# Altium PCB wol_pcb.PcbDoc
Units mm, origin at the board's own origin, x right, y up, seen from the top; angles counter-clockwise.
Board outline 20 x 58 mm, 2 copper layers (Top Layer, Bottom Layer); 33 components, 28 nets, 152 pads, 24 vias.
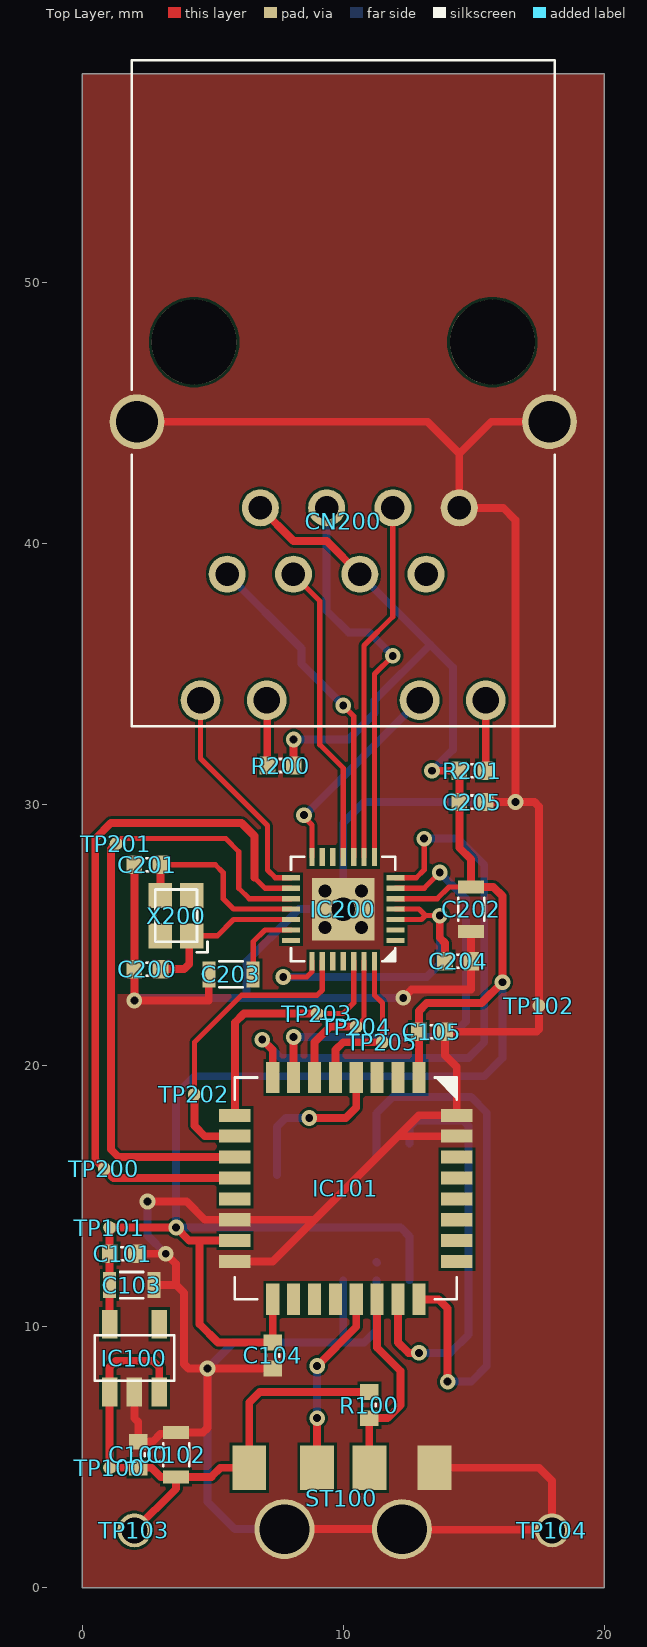
[diagram p0: Top Layer view]
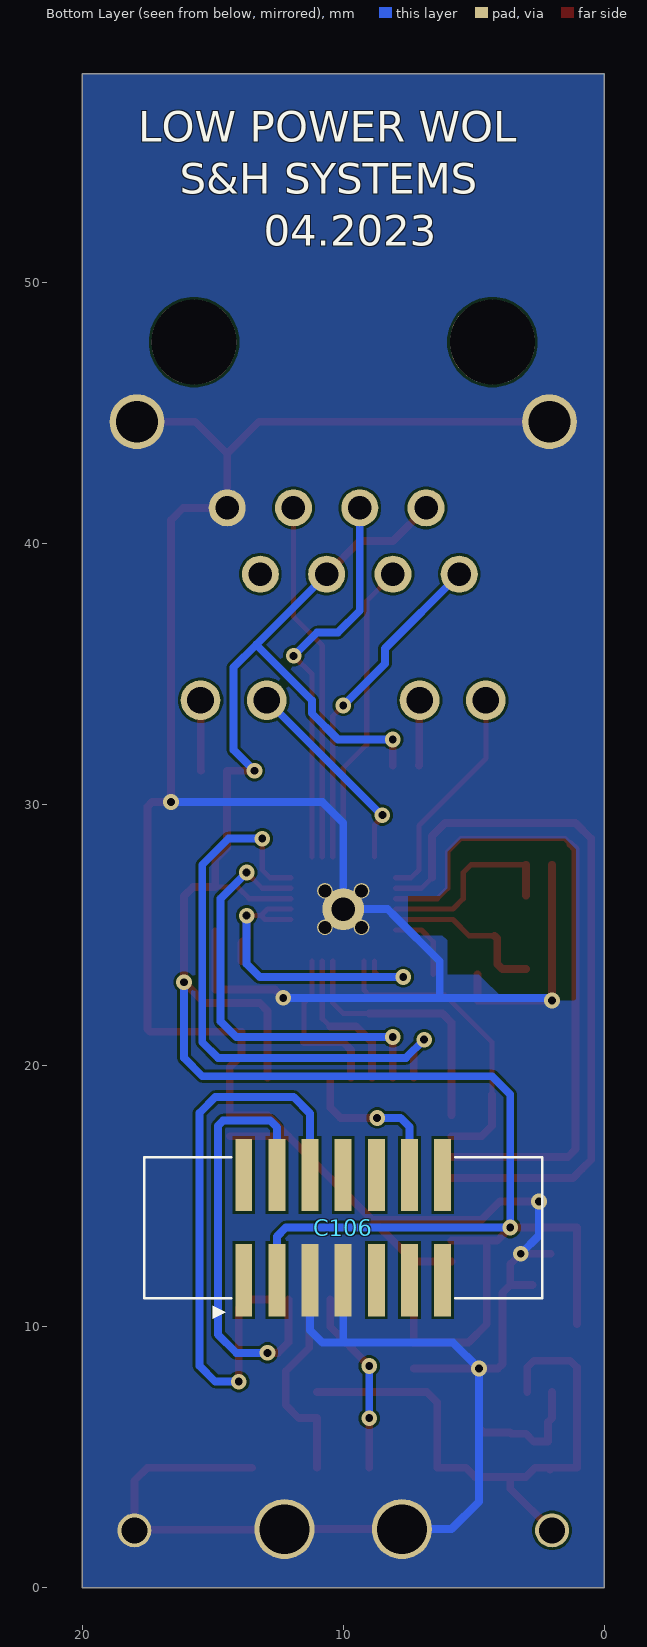
[diagram p1: Bottom Layer view, seen from below]
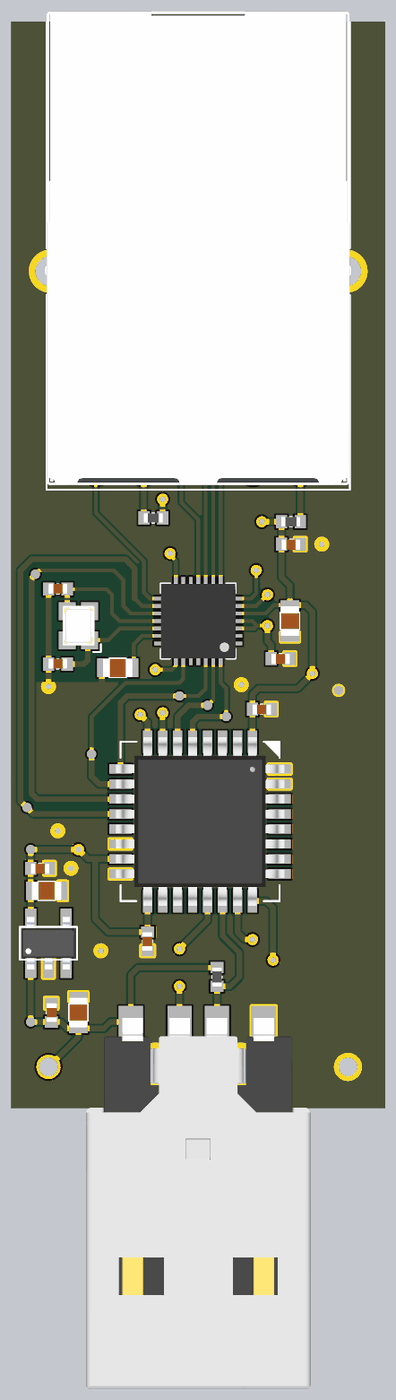
[diagram p2: 3D render of the assembled board from above, using the file's embedded part models]

## Layer stack, top to bottom
Top Solder: solder mask 0.0102, Solder Resist, Dk 3.5
Top Layer: signal copper 0.0356
Dielectric 1: dielectric 0.32, FR-4, Dk 4.8
Bottom Layer: signal copper 0.0356
Bottom Solder: solder mask 0.0102, Solder Resist, Dk 3.5

## Board outline
0,0 20,0 20,58 0,58

## Design rules (kind name [scope] priority, off if disabled: settings)
Clearance [All] p1: gap=0.1 ignorepadtopadclearanceinfootprint=FALSE
HoleSize [All] p1: absolutevalues=TRUE maxlimit=20 minlimit=0.025 maxpercent=80.000 minpercent=20.000
MinimumSolderMaskSliver [HasFootprint('No Footprint')] p1: minsoldermaskwidth=0.1
PlaneConnect [All] p1: planeconnectstyle=Direct reliefexpansion=0.508 reliefentries=4 reliefconductorwidth=0.254 reliefairgap=0.254
PolygonConnect [All] p1: connectstyle=Direct reliefconductorwidth=0.254 reliefentries=4 polygonreliefangle="90 Angle" airgapwidth=0.254
RoomDefinition Ethernet [InComponentClass('Ethernet')] p1: confinementstyle=ConfineIn formatcopy=TRUE lockcomponents=FALSE outline -36,-26 185,-26 185,74 -36,74
RoomDefinition Controller [InComponentClass('Controller')] p2: confinementstyle=ConfineIn formatcopy=TRUE lockcomponents=FALSE outline -36,-26 185,-26 185,74 -36,74
RoutingVias [All] p1: holewidth=0.5 width=0.8 viastyle="Through Hole" minholewidth=0.3 minwidth=0.6 maxholewidth=1 maxwidth=1.3
SilkToSolderMaskClearance [IsPad vs HasFootprint('No Footprint')] p1: minsilkscreentomaskgap=0.254 clearancetoexposedcopper=TRUE
SolderMaskExpansion [All] p1: expansion=0.102 istentingtop=FALSE
Width [All] p1: maxlimit=1 minlimit=0.2 preferedwidth=0.3 minimp=50.000000 maximp=50.000000 favimp=50.000000
26 further rules are at their usual default settings.

## Classes and differential pairs
component class Ethernet: C200 C201 C202 C203 C204 C205 CN200 IC200 R200 R201 TP200 TP201 TP202 TP203 TP204 TP205 X200
component class Controller: C100 C101 C102 C103 C104 C105 C106 IC100 IC101 R100 ST100 TP100 TP101 TP102 TP103 TP104

## Components (designator, comment, footprint, x,y, rotation, side; value= is the part's Value field where it differs from the comment)
C100 "1u" C_0402 2.15,5.1 r270 top
C101 "1u" C_0402 1.55,12.8 r180 top
C102 "4u7" C_0603 3.6,5.1 r270 top
C103 "4u7" C_0603 1.9,11.6 r180 top
C104 "100n" C_0402 7.3,8.9 r90 top
C105 "100n" C_0402 13.4,21.3 r180 top
C106 "Mini SWD Header" "Mini SWD Header" 10,13.8 r180 bottom
C200 "12p" C_0402 2.5,23.7 r0 top
C201 "12p" C_0402 2.5,27.7 r0 top
C202 "2u2" C_0603 14.9,26 r90 top
C203 "1u" C_0603 5.7,23.5 r0 top
C204 "100n" C_0402 14.4,24 r180 top
C205 "100n" C_0402 14.95,30.1 r180 top
CN200 "WE-RJ45LAN" 7499010121A 10,34 r0 top
IC100 "TLV74033PDBVR" SOT-23 2,8.8 r90 top
IC101 "STM32G431KBT6" LQFP32 10.1,15.3 r270 top
IC200 "CH9120" QFN28 10,26 r180 top
R100 "1K5" R_0402 11,7 r90 top
R200 "330R" R_0402 7.6,31.5 r0 top
R201 "330R" R_0402 14.95,31.3 r180 top
ST100 "WR-COM USB 2.0 Plug SMT" 629004113921 10,4.6 r0 top
TP100 "TP" STP_0.5mm 1.05,4.6 r90 top
TP101 "TP" STP_0.5mm 1.05,13.8 r90 top
TP102 "TP" STP_0.5mm 17.5,22.3 r90 top
TP103 "EXT_5V0" TTP_1mm 2,2.2 r90 top
TP104 "EXT_GND" TTP_1mm 18,2.2 r90 top
TP200 "TP" STP_0.5mm 0.85,16.05 r90 top
TP201 "TP" STP_0.5mm 1.3,28.5 r90 top
TP202 "TP" STP_0.5mm 4.3,18.9 r90 top
TP203 "TP" STP_0.5mm 9,22 r90 top
TP204 "TP" STP_0.5mm 10.5,21.5 r90 top
TP205 "TP" STP_0.5mm 11.5,20.9 r90 top
X200 "XRCGB32M000F0L00R0" HCR2016 3.6,25.75 r270 top

## Footprints (in the part's own frame and the unit in brackets; to place one, negate y for a bottom-side part, rotate by r counter-clockwise, add the part's x,y. Pads: shape width x height; smd on the part's side, far side on the other; paste and mask are expansions set on the pad)
7499010121A [mm]
  round 1.42 hole 0.9: 1(-4.445,4.83) 2(-3.175,7.37) 3(-1.905,4.83) 4(-0.635,7.37) 5(0.635,4.83) 6(1.905,7.37) 7(3.175,4.83) 8(4.445,7.37)
  round 1.52 hole 1.02: 9(-5.465,0) 10(-2.925,0) 11(2.925,0) 12(5.465,0)
  round 2.1 hole 1.6: 13(-7.9,10.67) 13(7.9,10.67)
  round 3.25 hole 3.25 unplated: ""(-5.715,13.72) ""(5.715,13.72)
  silkscreen extent -8.1,-1 8.1,24.52, body extent -8.2,-0.75 8.2,24.55, height 13.56
629004113921 [mm]
  rect 1.3x1.7 smd: 1(-3.6,0) 2(-1,0) 3(1,0) 4(3.5,0)
  round 2.3 hole 1.9: 5(-2.25,-2.35) 5(2.25,-2.35)
  body extent -6,-19.58 6,0.22, height 2.25
C_0402 [mm]
  rect 0.6x0.7 smd: 1(-0.5,0) 2(0.5,0)
  silkscreen extent -0.05,-0.25 0.05,0.25, body extent -0.5,-0.25 0.5,0.3, height 0.5
C_0603 [mm]
  rect 0.5x1 smd: 1(-0.85,0) 2(0.85,0)
  silkscreen extent -0.44,-0.5 0.44,0.5, body extent -0.8,-0.5 0.8,0.5, height 0.8
HCR2016 [mm]
  rect 0.95x0.9 smd: 1(0.775,0.6) 2(-0.775,0.6) 2(0.775,-0.6) 3(-0.775,-0.6)
  silkscreen extent -1,-0.8 1.4,1.2, body extent -1,-0.8 1,0.8, height 0.7
LQFP32 [mm]
  rect 1.2x0.5 smd: 1(-4.25,2.8) 2(-4.25,2) 3(-4.25,1.2) 4(-4.25,0.4) 5(-4.25,-0.4) 6(-4.25,-1.2) 7(-4.25,-2) 8(-4.25,-2.8) 17(4.25,-2.8) 18(4.25,-2) 19(4.25,-1.2) 20(4.25,-0.4) 21(4.25,0.4) 22(4.25,1.2) 23(4.25,2) 24(4.25,2.8)
  rect 0.5x1.2 smd: 9(-2.8,-4.25) 10(-2,-4.25) 11(-1.2,-4.25) 12(-0.4,-4.25) 13(0.4,-4.25) 14(1.2,-4.25) 15(2,-4.25) 16(2.8,-4.25) 25(2.8,4.25) 26(2,4.25) 27(1.2,4.25) 28(0.4,4.25) 29(-0.4,4.25) 30(-1.2,4.25) 31(-2,4.25) 32(-2.8,4.25)
  silkscreen extent -4.25,-4.25 4.25,4.25, body extent -4.5,-4.5 4.5,4.5, height 1.6
"Mini SWD Header" [mm]
  rect 0.65x2.77 smd: 1(-3.81,-2.015) 2(-3.81,2.015) 3(-2.54,-2.015) 4(-2.54,2.015) 5(-1.27,-2.015) 6(-1.27,2.015) 7(0,-2.015) 8(0,2.015) 9(1.27,-2.015) 10(1.27,2.015) 11(2.54,-2.015) 12(2.54,2.015) 13(3.81,-2.015) 14(3.81,2.015)
  silkscreen extent -7.62,-3.5 7.62,2.7, body extent -7.62,-2.75 7.62,2.75, height 5.1
QFN28 [mm]
  round 0.6 hole 0.5: 0(-0.7,0.7) 0(-0.7,-0.7) 0(0.7,0.7) 0(0.7,-0.7)
  rect 2.4x2.4 smd: 0(0,0)
  round 1.6 hole 0.9: 0(0,0)
  rect 0.7x0.2 smd: 1(-2,1.2) 2(-2,0.8) 3(-2,0.4) 4(-2,0) 5(-2,-0.4) 6(-2,-0.8) 7(-2,-1.2) 15(2,-1.2) 16(2,-0.8) 17(2,-0.4) 18(2,0) 19(2,0.4) 20(2,0.8) 21(2,1.2)
  rect 0.2x0.7 smd: 8(-1.2,-2) 9(-0.8,-2) 10(-0.4,-2) 11(0,-2) 12(0.4,-2) 13(0.8,-2) 14(1.2,-2) 22(1.2,2) 23(0.8,2) 24(0.4,2) 25(0,2) 26(-0.4,2) 27(-0.8,2) 28(-1.2,2)
  silkscreen extent -2,-2 2,2, body extent -2,-2 2,2, height 0.77
R_0402 [mm]
  rect 0.6x0.7 smd: 1(-0.5,0) 2(0.5,0)
  silkscreen extent -0.05,-0.25 0.05,0.25, body extent -0.5,-0.25 0.5,0.25, height 0.35
SOT-23 [mm]
  rect 1.1x0.6 smd: 1(-1.3,0.95) 2(-1.3,0) 3(-1.3,-0.95) 4(1.3,-0.95) 5(1.3,0.95)
  silkscreen extent -0.87,-1.53 0.87,1.53, body extent -1.4,-1.45 1.4,1.45, height 1.45
STP_0.5mm [mm]
  round 0.5 smd: 1(0,0)
TTP_1mm [mm]
  round 1.3 hole 1: 1(0,0)

## Part data
C100 C101 C102 C103 C104 C105 C200 C201 C202 C203 C204 C205: library part CeCa
C106: Manufacturer Nr.=3220-14-0300-00
CN200: "Modulare Steckverbinder / Ethernet-Steckverbinder WE-RJ45 Intgtd XFMR 1x1 THT Tab Up", ComponentLink1Description=Datasheet, ComponentLink1URL=https://www.we-online.com/components/products/datasheet/7499010121A.pdf
IC100: "Linear Voltage Regulator IC Positive Fixed 1 Output 300mA SOT-23-5", ComponentLink1Description="New link", ComponentLink1URL=https://www.ti.com/lit/ds/symlink/tlv740p.pdf?ts=1680939934820
IC101: "ARM Microcontrollers - MCU Mainstream Arm Cortex-M4 MCU 170 MHz 128 Kbytes of Flash Math Accel, Medium Anal", ComponentLink1Description=Datasheet, ComponentLink1URL=https://www.st.com/resource/en/datasheet/stm32g431kb.pdf
IC200: "Network and UART Transparent Transmission Chip", ComponentLink1Description=Datasheet, ComponentLink1URL=http://www.wch-ic.com/downloads/file/317.html?time=2022-08-22%2013:41:33&code=5fVJkrWqOqsN9oFySIYUkoTgQwx098RKZyXylZKH
R100 R200 R201: library part Res
ST100: "CONN PLUG USB2.0 TYPEA 4P SMD RA", ComponentLink1Description="New link", ComponentLink1URL=https://www.we-online.com/components/products/datasheet/629004113921.pdf
TP103 TP104: library part TP
X200: ComponentLink1Description="New link", ComponentLink1URL=https://www.murata.com/products/productdata/8801079099422/SPEC-XRCGB32M000F0L00R0.pdf?1541043011000

## Via types
v1: diameter 0.6, hole 0.3, Top Layer to Bottom Layer, 24 vias

## Nets (pads, with @x,y where several pads share a name; then routed paths per layer and width w, separated by ;. In a path a pad name is that pad's centre, name@x,y a point inside that pad or via, vN(x,y) a via of type N, cw(c..) or ccw(c..) an arc to the next point about the centre after c; other vN are vias at no path point)
3V3: C101.2 C103.2 C104.2 C105.2 C106.3 C202.2 C205.2 CN200.2 CN200.5 IC100.5 IC101.1 IC101.15 IC101.17 IC200.5 R200.2 R201.2 TP101.1 | length 90.3
  Top Layer w0.2: IC200.5 13.6,26.4 14.05,26.85 C202.2
  Top Layer w0.3: IC100.5 C101.2 TP101.1 v1(3.6,13.8) 4.1,13.3 4.5,13.3 ; IC101.15 4.5,13.3 ; CN200.2 8.095,40.1 9.365,40.1 CN200.5 ; IC101.17 C104.2 5.2,9.4 4.5,10.1 4.5,13.3 ; R200.2 v1(8.1,32.5) ; IC101.1 12.9,22.1 13.2,22.4 15.3,22.4 v1(16.1,23.2) 16.1,26.5 15.75,26.85 C202.2 14.9,27.9 14.45,28.35 C205.2 R201.2 v1(13.4,31.3)
  Bottom Layer w0.3: v1(8.1,32.5) 10.2,32.5 11.2,33.5 11.2,34 13.333,36.133 ; CN200.5 13.333,36.133 ; C106.3 12.54,13.46 12.2,13.8 v1(3.6,13.8) 3.6,18.9 4.3,19.6 15.4,19.6 16.1,20.3 v1(16.1,23.2) ; v1(13.4,31.3) 14.2,32.1 14.2,35.265 13.333,36.133
5V0: C100.2 C102.2 IC100.1 IC100.3 R100.2 ST100.1 TP100.1 TP103.1 | length 22.6
  Top Layer w0.3: TP103.1 3.6,3.8 C102.2 ; C100.2@2.075,4.525 C100.2 ; IC100.3 2.95,8.45 2.7,8.7 1.3,8.7 1.05,8.45 IC100.1 TP100.1 C100.2 ; R100.2 6.8,7.5 6.4,7.1 ST100.1 5.3,4.6 4.95,4.25 C102.2 ; C100.2 2.656,4.6 3.009,4.247 3.597,4.247 C102.2
ACT: CN200.11 IC200.14 | length 8
  Top Layer w0.2: v1@8.5,29.519 8.8,29.219 IC200.14
  Top Layer w0.3: v1@8.5,29.519 v1(8.5,29.6)
  Bottom Layer w0.3: v1(8.5,29.6) 8.525,29.6 CN200.11
ETH_CFG: IC101.9 IC200.26 TP203.1 | length 10
  Top Layer w0.2: TP203.1 10,22 10.4,22.4 IC200.26
  Top Layer w0.3: IC101.9 5.85,21.65 6.2,22 TP203.1
ETH_CFGEN: IC101.10 IC200.23 TP202.1 | length 11.7
  Top Layer w0.2: TP202.1 4.3,20.9 6.1,22.7 9,22.7 9.2,22.9 IC200.23
  Top Layer w0.3: TP202.1 4.3,17.7 4.7,17.3 IC101.10
ETH_nFAC: IC101.6 IC200.27 TP204.1 | length 5.8
  Top Layer w0.2: TP204.1 10.8,21.8 IC200.27
  Top Layer w0.3: IC101.6 8.9,20.9 9.5,21.5 TP204.1
ETH_nRST: IC101.12 IC200.16 TP200.1 | length 27.7
  Top Layer w0.2: 6.6,27.2 7,26.8 IC200.16
  Top Layer w0.3: IC101.12 1.2,15.7 TP200.1 0.5,16.4 0.5,28.7 1.1,29.3 6.1,29.3 6.6,28.8 6.6,27.2
ETH_nTCPCS: IC101.5 IC200.28 TP205.1 | length 6.2
  Top Layer w0.2: IC200.28 11.2,22.7 11.5,22.4 TP205.1
  Top Layer w0.3: IC101.5 9.7,20.6 10,20.9 TP205.1
ETH_RUN: IC101.11 IC200.17 TP201.1 | length 25.2
  Top Layer w0.2: TP201.1 1.5,28.7 5.5,28.7 6,28.2 6,26.8 6.4,26.4 IC200.17
  Top Layer w0.3: TP201.1 1.1,28.3 1.1,16.8 1.4,16.5 IC101.11
GND: C100.1 C101.1 C102.1 C103.1 C104.1 C105.1 C106.5 C106.7 C200.1 C201.1 C202.1 C203.1 C204.1 C205.1 CN200.8 CN200.13 IC100.2 IC101.14 IC101.16 IC101.31 IC101.32 IC200.0 ST100.4 ST100.5 TP102.1 TP104.1 | length 166.1
  Top Layer w0.3: IC100.2 2,6.5 2.15,6.35 C100.1 2.7,5.6 3,5.9 3.55,5.9 C102.1 4.624,5.95 4.8,6.126 v1(4.8,8.4) ; C201.1 2,22.6 2.1,22.5 3.8,22.5 4.85,22.5 C203.1 ; C101.1 v1(3.2,12.8) 3.6,12.4 3.6,11.6 ; CN200.13@2.1,44.67 13.23,44.67 14.445,43.455 14.445,43.445 ; v1(2.5,14.8) 4,14.8 4.7,14.1 IC101.14 8.9,14.1 ; C103.1 3.6,11.6 ; IC101.16 7.3,12.5 8.9,14.1 ; C104.1 v1(4.8,8.4) ; ST100.5@7.75,2.25 12.25,2.25 ST100.5@12.55,2.25 ; v1(12.3,22.6) 12.614,22.914 14.9,22.914 C204.1 C202.1 ; ST100.5@12.55,2.225 17.975,2.225 TP104.1 18,4.1 17.5,4.6 ST100.4 ; IC101.31 12.1,17.3 ; C205.1 v1(16.6,30.1) ; CN200.13@17.9,44.67 15.67,44.67 14.445,43.445 ; 3.6,11.6 3.9,11.3 3.9,8.576 4.076,8.4 v1(4.8,8.4) ; 8.9,14.1 12.1,17.3 ; 12.1,17.3 12.9,18.1 IC101.32 14.35,19.95 13.9,20.4 C105.1 17.4,21.3 17.5,21.4 TP102.1 17.5,29.924 17.324,30.1 v1(16.6,30.1) ; 14.445,43.445 CN200.8 16.13,41.37 16.6,40.9 v1(16.6,30.1)
  Bottom Layer w0.3: v1(2,22.5) 2.1,22.6 6.3,22.6 ; v1(2.5,14.8) 2.5,13.5 v1(3.2,12.8) ; ST100.5@7.75,2.25 5.85,2.25 4.8,3.3 v1(4.8,8.4) 5.8,9.4 10,9.4 ; C106.7 10,9.4 ; C106.5 11.27,9.87 10.8,9.4 10,9.4 ; C106.5@11.27,12.485 C106.5@11.3,12.455 ; v1(12.3,22.6) 6.3,22.6 ; v1(16.6,30.1) 10.8,30.1 10,29.3 10,26 8.3,26 8,25.7 6.3,24 6.3,22.6
LINK: CN200.9 IC200.15 | length 8.6
  Top Layer w0.2: CN200.9 4.535,31.765 7.1,29.2 7.1,27.5 7.4,27.2 IC200.15
NetCN200_10: CN200.10 R200.1 | length 2.5
  Top Layer w0.3: CN200.10 7.088,33.987 7.088,31.512 R200.1
NetCN200_12: CN200.12 R201.1 | length 2.7
  Top Layer w0.3: R201.1 15.458,31.308 15.458,33.992 CN200.12
NRST: C106.12 IC101.4 | length 6.3
  Top Layer w0.3: v1(8.7,18) 10.1,18 10.5,18.4 IC101.4
  Bottom Layer w0.3: C106.12 7.46,17.66 7.8,18 v1(8.7,18)
RXN: CN200.6 IC200.9 | length 13.8
  Top Layer w0.2: IC200.9 10.8,36.1 11.9,37.2 11.9,41.365 CN200.6
RXP: CN200.4 IC200.8 | length 15.2
  Top Layer w0.2: IC200.8 11.2,35 v1(11.9,35.7)
  Bottom Layer w0.3: CN200.4 9.365,37.435 10.2,36.6 11,36.6 v1(11.9,35.7)
STM_RX: IC101.8 IC200.7 | length 22.6
  Top Layer w0.2: IC200.7 12.8,27.2 13.1,27.5 v1(13.1,28.7)
  Top Layer w0.3: v1(6.9,21) 7.3,20.6 IC101.8
  Bottom Layer w0.3: v1(6.9,21) 7.6,20.3 14.8,20.3 15.4,20.9 15.4,27.7 14.4,28.7 v1(13.1,28.7)
STM_TX: IC101.7 IC200.6 | length 16.5
  Top Layer w0.2: IC200.6 13.1,26.8 v1(13.7,27.4)
  Top Layer w0.3: IC101.7 v1(8.1,21.1)
  Bottom Layer w0.3: v1(8.1,21.1) 14.1,21.1 14.7,21.7 14.7,26.4 v1(13.7,27.4)
SWDCLK: C106.6 IC101.24 | length 21.9
  Top Layer w0.3: IC101.24 13.65,11.05 14,10.7 v1(14,7.9)
  Bottom Layer w0.3: C106.6@11.27,16.515 11.27,18.17 11.9,18.8 14.9,18.8 15.5,18.2 15.5,8.5 14.9,7.9 v1(14,7.9)
SWDIO: C106.4 IC101.23 | length 15.9
  Top Layer w0.3: IC101.23 12.1,9.4 12.5,9 v1(12.9,9)
  Bottom Layer w0.3: C106.4@12.54,17.015 12.54,17.64 12.8,17.9 14.6,17.9 14.8,17.7 14.8,9.7 14.1,9 v1(12.9,9)
TXN: CN200.3 IC200.11 | length 11.6
  Top Layer w0.2: CN200.3 8.095,38.805 9.1,37.8 9.1,32.3 10,31.4 IC200.11
TXP: CN200.1 IC200.10 | length 12.8
  Top Layer w0.2: v1(10,33.8) 10.4,33.4 IC200.10
  Bottom Layer w0.3: CN200.1 8.4,35.985 8.4,35.4 v1(10,33.8)
USB_DN: IC101.21 ST100.2 | length 7.1
  Top Layer w0.3: ST100.2 v1(9,6.5) ; v1(9,8.5) 10.5,10 IC101.21
  Bottom Layer w0.3: v1(9,6.5) v1(9,8.5)
USB_DP: IC101.22 R100.1 ST100.3 | length 7.7
  Top Layer w0.3: ST100.3 R100.1 11.7,6.5 12.2,7 12.2,8.3 11.3,9.2 IC101.22
VCC: C204.2 IC200.3 IC200.4 IC200.22 | length 14.5
  Top Layer w0.2: v1(7.7,23.4) 8.6,23.4 8.8,23.6 IC200.22 ; IC200.3 13,25.6 13.15,25.75 ; IC200.4 12.9,26 13.15,25.75 ; v1(13.7,25.75) 13.15,25.75
  Top Layer w0.3: v1(13.7,25.75) 13.7,24.9 13.9,24.7 C204.2
  Bottom Layer w0.3: v1(7.7,23.4) 13.2,23.4 13.7,23.9 v1(13.7,25.75)
VREF: C203.2 IC200.20 | length 2.9
  Top Layer w0.2: C203.2 6.55,24.75 7,25.2 IC200.20
XI: C200.2 IC200.19 X200.1 | length 6.4
  Top Layer w0.2: X200.1 5.175,24.975 5.8,25.6 IC200.19
  Top Layer w0.3: C200.2 3.9,23.7 4.1,23.9 4.1,24.875 X200.1
XO: C201.2 IC200.18 X200.3 | length 7.5
  Top Layer w0.2: C201.2 5.1,27.7 5.4,27.4 5.4,26.4 5.8,26 IC200.18
  Top Layer w0.3: X200.3 C201.2
pads on no net: C106.1 C106.2 C106.8 C106.9 C106.10 C106.11 C106.13 C106.14 CN200. CN200.7 IC100.4 IC101.2 IC101.3 IC101.13 IC101.18 IC101.19 IC101.20 IC101.25 IC101.26 IC101.27 IC101.28 IC101.29 IC101.30 IC200.1 IC200.2 IC200.12 IC200.13 IC200.21 IC200.24 IC200.25 X200.2

## Polygon pours and split planes (outlines as drawn)
GND on Bottom Layer "BOT_GND" (solid, remove dead copper, pour order 1): 0,0 20,0 20,58 0,58
GND on Top Layer "TOP_GND" (solid, remove dead copper, pour order 0): 0,0 20,0 20,58 0,58

## Other copper
Top Layer:
  pour cut-out: 1.5,28.7 5.5,28.7 6,28.2 6,26.8 6.3,26.5 7.5,26.5 7.5,25 6,25 6,22.742 1.1,22.742 1.1,28.3
Bottom Layer:
  pour cut-out: 1.5,28.7 5.5,28.7 6,28.2 6,26.8 6.3,26.5 7.5,26.5 7.5,25 6.2,25 6,24.8 6,23.5 4.8,23.5 3.8,22.5 1.15,22.5 1.1,22.55 1.1,28.3

## Silkscreen, mask and mechanical layers (free items; w line width, h text height)
Bottom Overlay:
  text "LOW POWER WOL" at 17.85,55.021 h2
  text "S&H SYSTEMS" at 16.271,53.029 h2
  text "04.2023" at 13.053,51.022 h2
Mechanical 1:
  the board outline again, w0.1